# EAGLE board InkTime_Board (EAGLE 9.7.0), part 1 of 2
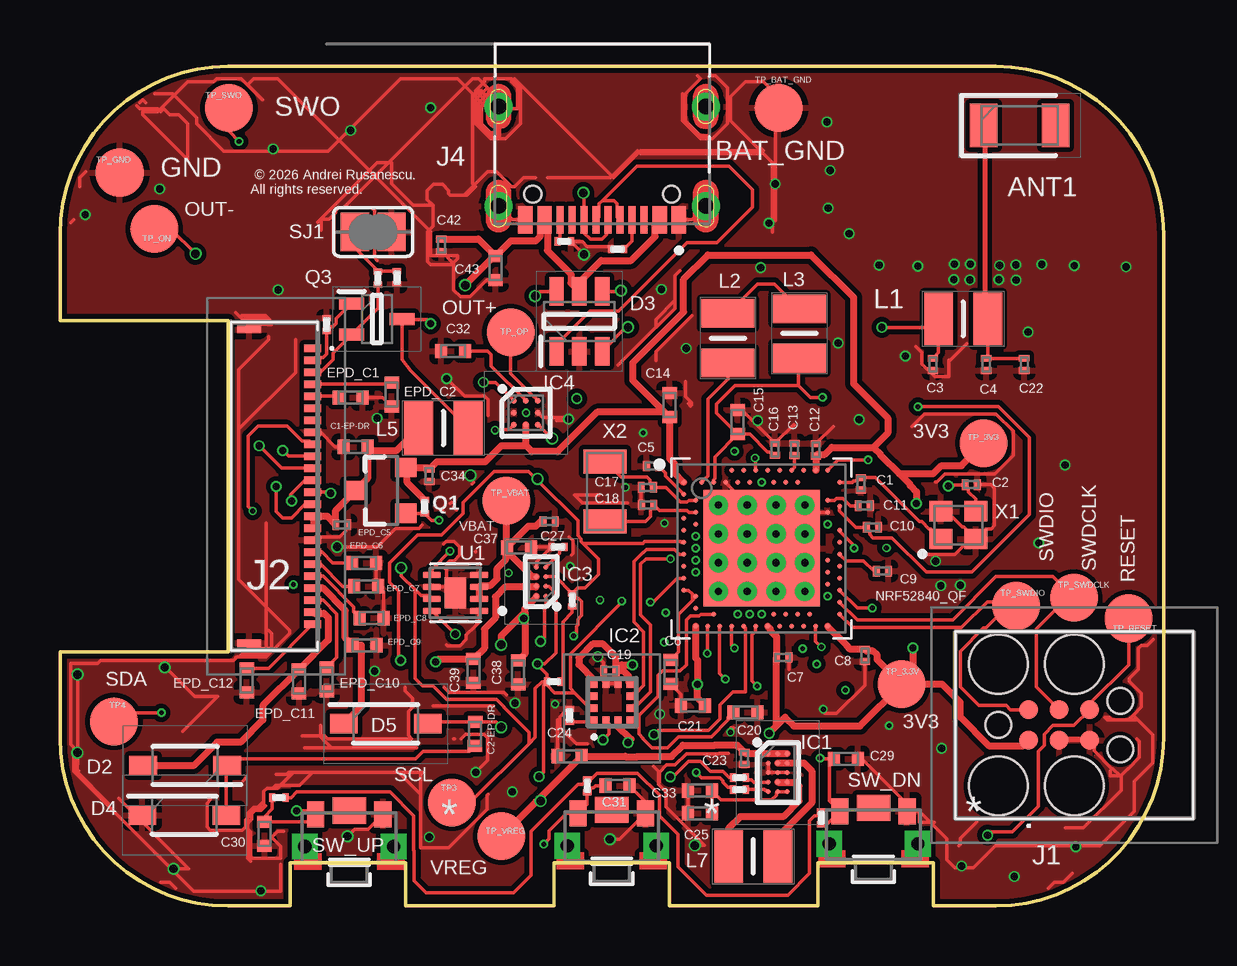
[diagram p0: board, top side]
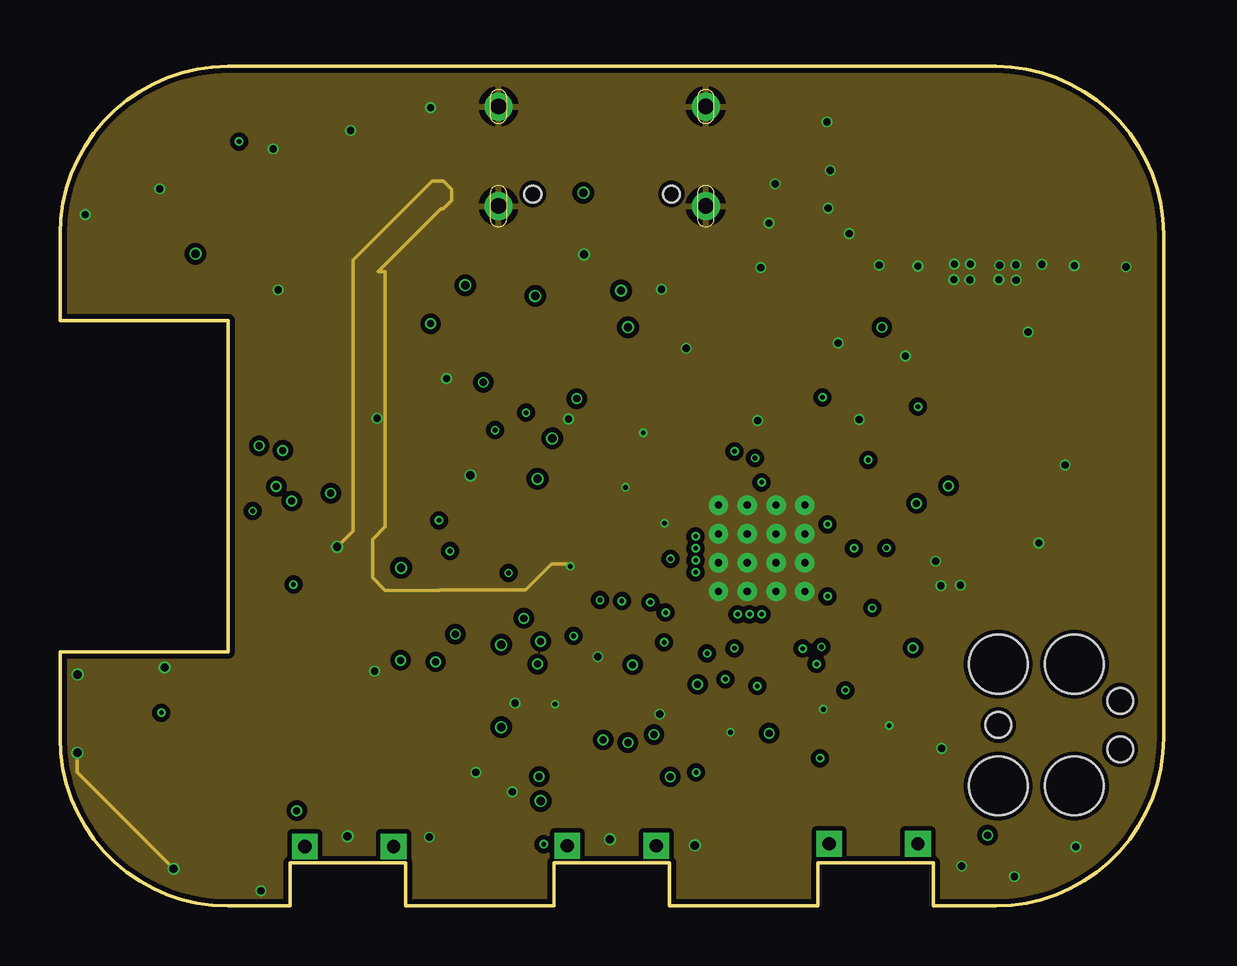
[diagram p1: board, inner layer Route2]
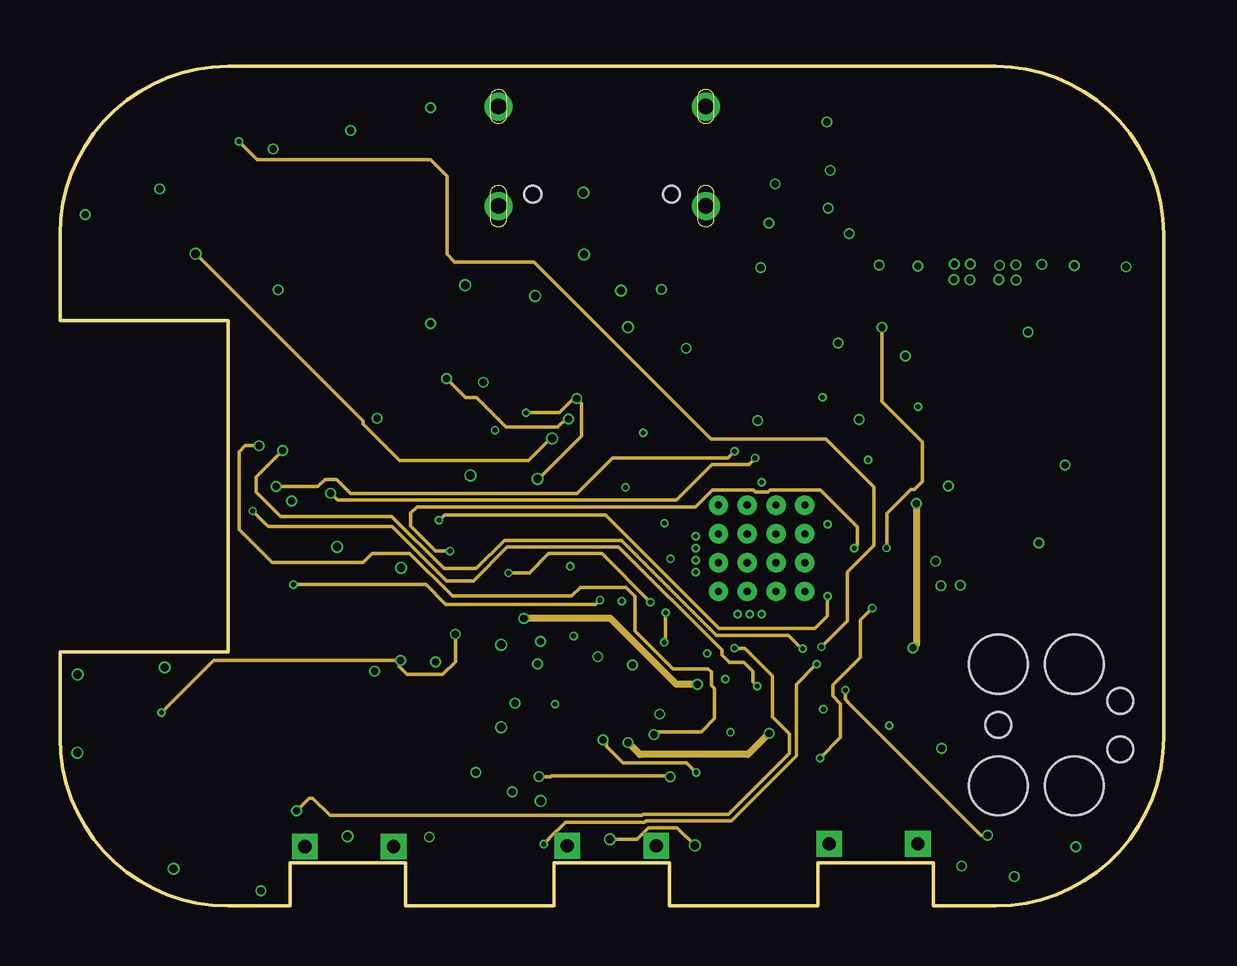
[diagram p2: board, inner layer Route15]
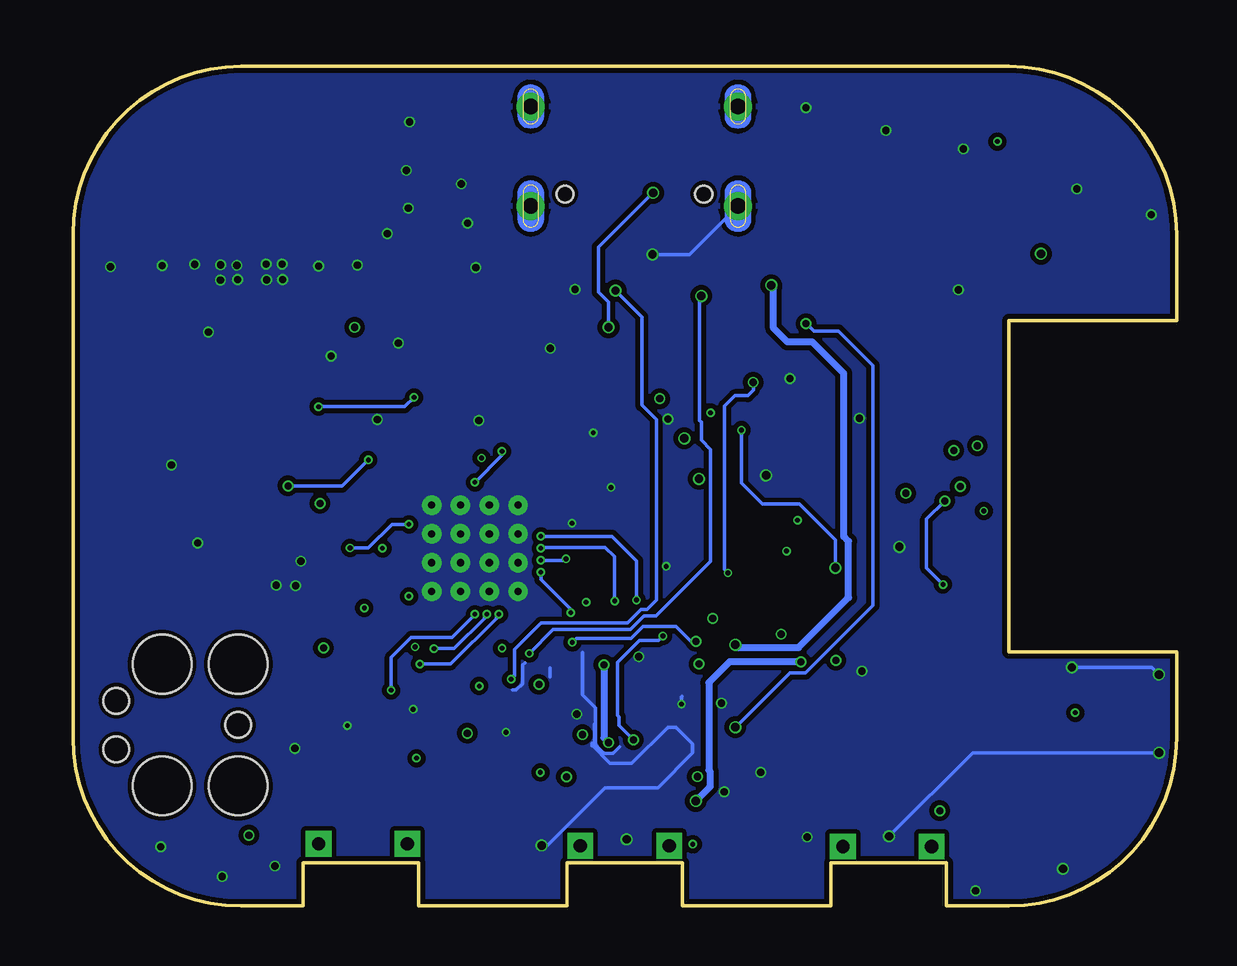
[diagram p3: board, bottom side, seen from below]

Size 46 x 35 mm. Coordinates in mm from the lower left corner, seen from the top.
Outline: 39,0 36.4,0 36.4,1.8 31.6,1.8 31.6,0 25.4,0 25.4,1.8 20.6,1.8 20.6,0 14.4,0 14.4,1.8 9.6,1.8 9.6,0 7,0 arc-90 0,7 0,10.6 7,10.6 7,24.4 0,24.4 0,28 arc-90 7,35 39,35 arc-90 46,28 46,7 arc-90 39,0
Copper layers (1+2*15+16): Top 0.035mm / dielectric 1.6mm / Route2 0.035mm / dielectric 0.15mm / Route15 0.035mm / dielectric 0.2mm / Bottom 0.035mm
Design rules "jlcpcb-2layers.dru *": minimum track width 0.15mm, minimum drill 0.2mm, track to track 5mil, track to pad 0.15mm, pad to pad 0.15mm, via to via 0.15mm, smd to smd 0.15mm, copper to edge 0.2mm, drill to drill 6mil, minimum pad ring 10mil, minimum via ring 0.075mm, stop-mask expansion 4mil, vias tented up to drill 0mil, thermal gap 10mil
Net classes: 1 power_width: width 0.3 mm

## Footprints (pad centres in the part's own frame; a part is rotated, then mirrored left to right if it is on the bottom)
2450AT18B100E_ANTC3216X140N = smd 1.15 x 1.8: 1 -1.5,0; 2 1.5,0
NORDIC_NRF_3_RESC0201_L = smd 0.28 x 0.43: 1 -0.255,0; 2 0.255,0
NORDIC_NRF_3_RESC0402_L = smd 0.5 x 0.6: 1 -0.5,0; 2 0.5,0
ESP32_C6_LIBRARY_5_SOD3716X135N = smd 1.15 x 0.8: 1 -1.75,0; 2 1.75,0
ESP32_C6_LIBRARY_3_SOT95P280X145-6N = smd 1.2 x 0.6: 1 -1.25,0.95; 2 -1.25,0; 3 -1.25,-0.95; 4 1.25,-0.95; 5 1.25,0; 6 1.25,0.95
RT6160AWSC_BGA15C40P3X5_140X230X60 = smd 0.216 x 0.216: A1 -0.4,0.8; A2 0,0.8; A3 0.4,0.8; B1 -0.4,0.4; B2 0,0.4; B3 0.4,0.4; C1 -0.4,0; C2 0,0; C3 0.4,0; D1 -0.4,-0.4; D2 0,-0.4; D3 0.4,-0.4; E1 -0.4,-0.8; E2 0,-0.8; E3 0.4,-0.8
BMA423_BMA423 = smd 0.3 x 0.35: 1 -0.75,-0.775; 2 -0.25,-0.775; 3 0.25,-0.775; 4 0.75,-0.775; 7 0.75,0.775; 8 0.25,0.775; 9 -0.25,0.775; 10 -0.75,0.775 | smd 0.35 x 0.3: 5 0.775,-0.25; 6 0.775,0.25; 11 -0.775,0.25; 12 -0.775,-0.25
BQ25180YBGR_BGA8C40P2X4_100X155X50 = smd 0.2 x 0.2: A1 -0.2,0.6; A2 0.2,0.6; B1 -0.2,0.2; B2 0.2,0.2; C1 -0.2,-0.2; C2 0.2,-0.2; D1 -0.2,-0.6; D2 0.2,-0.6
DRV2605YZFR_BGA9C50P3X3_144X144X62 = smd 0.25 x 0.25: A1 -0.5,0.5; A2 0,0.5; A3 0.5,0.5; B1 -0.5,0; B2 0,0; B3 0.5,0; C1 -0.5,-0.5; C2 0,-0.5; C3 0.5,-0.5
TC2030-IDC_TC2030IDC = smd 0.783 x 0.783: 1 -0.953,-0.635; 2 -0.953,0.635; 3 0.317,-0.635; 4 0.317,0.635; 5 1.588,-0.635; 6 1.588,0.635 | hole 2.451: -2.223,-2.54; -2.223,2.54; 0.952,-2.54; 0.952,2.54 | hole 1.067: -2.223,0; 2.857,-1.016; 2.857,1.016
503480-2400_5034802400 = smd 0.3 x 0.7: 1 -5.75,1.525; 2 -5.25,1.525; 3 -4.75,1.525; 4 -4.25,1.525; 5 -3.75,1.525; 6 -3.25,1.525; 7 -2.75,1.525; 8 -2.25,1.525; 9 -1.75,1.525; 10 -1.25,1.525; 11 -0.75,1.525; 12 -0.25,1.525; 13 0.25,1.525; 14 0.75,1.525; 15 1.25,1.525; 16 1.75,1.525; 17 2.25,1.525; 18 2.75,1.525; 19 3.25,1.525; 20 3.75,1.525; 21 4.25,1.525; 22 4.75,1.525; 23 5.25,1.525; 24 5.75,1.525 | smd 0.3 x 1: MP1 -6.54,-1.125; MP2 6.54,-1.125
KH-TYPE-C-16P_KINGHELM_KH-TYPE-C-16P = smd 0.6 x 1.15: A1_B12 -3.2,4.725; A4_B9 -2.4,4.725; A9_B4 2.4,4.725; A12_B1 3.2,4.725 | smd 0.3 x 1.15: A5 -1.25,4.725; A6 -0.25,4.725; A7 0.25,4.725; A8 1.25,4.725; B5 1.75,4.725; B6 0.75,4.725; B7 -0.75,4.725; B8 -1.75,4.725 | drill 0.65 pad 1.05: SH1 -4.32,0; SH2 4.32,0; SH3 -4.32,4.15; SH4 4.32,4.15 | hole 0.7: -2.89,3.65; 2.89,3.65
MLP2016SR47MT0S1_INDC2016X100N = smd 1.2 x 2.2: 1 -1.028,0; 2 1.028,0
NORDIC_NRF_4_AQFN50P700X700X85_HS-74N = smd 4.85 x 4.85: P$74 0,0 | drill 0.3 pad 0.6: P$75 -1.8,1.8; P$76 -0.6,1.8; P$77 0.6,1.8; P$78 1.8,1.8; P$79 -1.8,0.6; P$80 -0.6,0.6; P$81 0.6,0.6; P$82 1.8,0.6; P$83 -1.8,-0.6; P$84 -0.6,-0.6; P$85 0.6,-0.6; P$86 1.8,-0.6; P$87 -1.8,-1.8; P$88 -0.6,-1.8; P$89 0.6,-1.8; P$90 1.8,-1.8 | smd 0.2 x 0.2: P$A8 -1.25,3.25; P$A10 -0.75,3.25; P$A12 -0.25,3.25; P$A14 0.25,3.25; P$A16 0.75,3.25; P$A18 1.25,3.25; P$A20 1.75,3.25; P$A22 2.25,3.25; P$A23 2.75,3.25; P$AA24 3.25,-2.25; P$AB2 -2.75,-2.5; P$AC5 -2,-2.75; P$AC9 -1,-2.75; P$AC11 -0.5,-2.75; P$AC13 0,-2.75; P$AC15 0.5,-2.75; P$AC17 1,-2.75; P$AC19 1.5,-2.75; P$AC21 2,-2.75; P$AC24 3.25,-2.75; P$AD2 -2.75,-3.25; P$AD4 -2.25,-3.25; P$AD6 -1.75,-3.25; P$AD8 -1.25,-3.25; P$AD10 -0.75,-3.25; P$AD12 -0.25,-3.25; P$AD14 0.25,-3.25; P$AD16 0.75,-3.25; P$AD18 1.25,-3.25; P$AD20 1.75,-3.25; P$AD22 2.25,-3.25; P$AD23 2.75,-3.25; P$B1 -3.25,2.75; P$B3 -2.5,2.75; P$B5 -2,2.75; P$B7 -1.5,2.75; P$B9 -1,2.75; P$B11 -0.5,2.75; P$B13 0,2.75; P$B15 0.5,2.75; P$B17 1,2.75; P$B19 1.5,2.75; P$B24 3.25,2.75; P$C1 -3.25,2.25; P$D2 -2.75,2; P$D23 2.75,2; P$E24 3.25,1.75; P$F2 -2.75,1.5; P$F23 2.75,1.5; P$G1 -3.25,1.25; P$H2 -2.75,1; P$H23 2.75,1; P$J1 -3.25,0.75; P$J24 3.25,0.75; P$K2 -2.75,0.5; P$L1 -3.25,0.25; P$L24 3.25,0.25; P$M2 -2.75,0; P$N1 -3.25,-0.25; P$N24 3.25,-0.25; P$P2 -2.75,-0.5; P$P23 2.75,-0.5; P$R1 -3.25,-0.75; P$R24 3.25,-0.75; P$T2 -2.75,-1; P$T23 2.75,-1; P$U1 -3.25,-1.25; P$U24 3.25,-1.25; P$V23 2.75,-1.5; P$W1 -3.25,-1.75; P$W24 3.25,-1.75; P$Y2 -2.75,-2; P$Y23 2.75,-2
ESP32_C6_LIBRARY_4_ESP32_C6_LIBRARY_4_ESP32_C6_LIBRARY_4_ESP32_C6_LIBRARY_4_ESP32_WROVER_SPARKFUN-DISCRETESEMI_SOT23-3 = smd 0.8 x 0.9: 1 -0.95,-1; 2 0.95,-1; 3 0,1.1
ESP32_C6_LIBRARY_6_SOT65P210X110-3N = smd 1.05 x 0.5: 1 -1.05,0.65; 2 -1.05,-0.65; 3 1.05,0
CPF0201D7K68C1_0201 = smd 0.35 x 0.25: 1 0,0.275; 2 0,-0.275
ESP32_C6_LIBRARY_7_JUMPER_SJ = smd 1.168 x 1.6: 1 -0.762,0; 2 0.762,0
2025-10-22_07-23-44_LIBRARY_SW_EVP-AKE31A_PAN = smd 0.711 x 1.092: 1 -1.4,-0.972; 2 1.4,-0.972 | drill 0.559 pad 0.914 square: 3 -1.848,0.381; 4 1.848,0.381 | smd 1.397 x 1.092: 5 0,-1.124
HECTOR_WATCH_1_TP20R = smd 2 x 2: TP 0,0
ESP32_C6_LIBRARY_SON50P200X200X80-9N = smd 0.76 x 0.27: 1 -0.985,0.75; 2 -0.985,0.25; 3 -0.985,-0.25; 4 -0.985,-0.75; 5 0.985,-0.75; 6 0.985,-0.25; 7 0.985,0.25; 8 0.985,0.75 | smd 0.9 x 1.3: 9 0,0
NORDIC_NRF_BT-XTAL_2016_N = smd 0.95 x 0.85: 1 -0.725,-0.575; 2 0.725,-0.575; 3 0.725,0.575; 4 -0.725,0.575
NORDIC_NRF_1_XTAL_3215_N = smd 1 x 1.8: 1 -1.25,0; 2 1.25,0

## Placement (x,y rotation side)
ANT1  2450AT18B100E  [2450AT18B100E_ANTC3216X140N]  40,32.54 0 top
C1  12pF  [NORDIC_NRF_3_RESC0201_L]  33.39,17.6 270 top
C1-EP-DR  10uF  [NORDIC_NRF_3_RESC0402_L]  12.32,19.14 180 top
C2  12pF  [NORDIC_NRF_3_RESC0201_L]  37.99,17.57 0 top
C2-EP-DR  4.7uF  [NORDIC_NRF_3_RESC0402_L]  17.3,7.17 89.2 top
C3  1pF  [NORDIC_NRF_3_RESC0201_L]  36.38,22.57 270 top
C4  1pF  [NORDIC_NRF_3_RESC0201_L]  38.6,22.57 270 top
C5  100nF  [NORDIC_NRF_3_RESC0201_L]  24.7,18.35 180 top
C6  4.7uF  [NORDIC_NRF_3_RESC0402_L]  25.46,9.77 270 top
C7  100nF  [NORDIC_NRF_3_RESC0201_L]  30.13,10.36 0 top
C8  100nF  [NORDIC_NRF_3_RESC0201_L]  33.55,10.45 270 top
C9  820pF  [NORDIC_NRF_3_RESC0201_L]  34.28,13.96 0 top
C10  N.C.  [NORDIC_NRF_3_RESC0201_L]  33.87,15.79 0 top
C11  100pF  [NORDIC_NRF_3_RESC0201_L]  33.53,16.68 0 top
C12  100nF  [NORDIC_NRF_3_RESC0201_L]  31.51,19.02 90 top
C13  N.C.  [NORDIC_NRF_3_RESC0201_L]  30.61,19.03 90 top
C14  4.7uF  [NORDIC_NRF_3_RESC0402_L]  25.41,20.88 90 top
C15  1.0uF  [NORDIC_NRF_3_RESC0402_L]  28.24,20.17 90 top
C16  47nF  [NORDIC_NRF_3_RESC0201_L]  29.8,19.04 90 top
C17  12pF  [NORDIC_NRF_3_RESC0201_L]  24.48,17.45 0 top
C18  12pF  [NORDIC_NRF_3_RESC0201_L]  24.5,16.72 0 top
C19  100nF  [NORDIC_NRF_3_RESC0201_L]  22.92,9.81 180 top
C20  4.7uF  [NORDIC_NRF_3_RESC0402_L]  28.57,8.07 0 top
C21  4.7uF  [NORDIC_NRF_3_RESC0402_L]  26.39,8.36 180 top
C22  N.C.  [NORDIC_NRF_3_RESC0201_L]  40.19,22.57 270 top
C23  0.1uF  [NORDIC_NRF_3_RESC0201_L]  28.53,6.16 90 top
C24  10uF  [NORDIC_NRF_3_RESC0402_L]  21.25,6.24 0 top
C25  22uF  [NORDIC_NRF_3_RESC0402_L]  26.67,3.87 180 top
C27  0.1uF  [NORDIC_NRF_3_RESC0201_L]  20.39,16.03 0 top
C29  1uF  [NORDIC_NRF_3_RESC0402_L]  32.76,6.14 0 top
C30  1uF  [NORDIC_NRF_3_RESC0402_L]  8.52,3.01 270 top
C31  1uF  [NORDIC_NRF_3_RESC0402_L]  23.24,5.01 0 top
C32  1uF  [NORDIC_NRF_3_RESC0402_L]  16.39,23.13 180 top
C33  22uF  [NORDIC_NRF_3_RESC0402_L]  26.67,4.82 180 top
C34  0.1uF  [NORDIC_NRF_3_RESC0201_L]  15.39,17.95 270 top
C37  1uF  [NORDIC_NRF_3_RESC0402_L]  19.14,14.94 0 top
C38  1uF  [NORDIC_NRF_3_RESC0402_L]  19.1,9.73 270 top
C39  10uF  [NORDIC_NRF_3_RESC0402_L]  17.24,9.8 270 top
C42  0.1uF  [NORDIC_NRF_3_RESC0201_L]  15.9,27.55 270 top
C43  4.7uF  [NORDIC_NRF_3_RESC0402_L]  18.16,26.59 270 top
D2  MBR0530  [ESP32_C6_LIBRARY_5_SOD3716X135N]  5.22,5.85 180 top
D3  ESP32_C6_LIBRARY_3_USBLC6-2SC6Y  [ESP32_C6_LIBRARY_3_SOT95P280X145-6N]  21.65,24.37 90 top
D4  MBR0530  [ESP32_C6_LIBRARY_5_SOD3716X135N]  5.18,3.79 0 top
D5  MBR0530  [ESP32_C6_LIBRARY_5_SOD3716X135N]  13.58,7.6 0 top
EPD_C1  1uF  [NORDIC_NRF_3_RESC0402_L]  12.12,21.2 180 top
EPD_C2  1uF  [NORDIC_NRF_3_RESC0402_L]  13.83,21.32 90 top
EPD_C5  0.1uF  [NORDIC_NRF_3_RESC0201_L]  11.75,15.89 180 top
EPD_C6  1uF  [NORDIC_NRF_3_RESC0402_L]  12.68,14.3 180 top
EPD_C7  1uF  [NORDIC_NRF_3_RESC0402_L]  12.77,13.33 180 top
EPD_C8  1uF  [NORDIC_NRF_3_RESC0402_L]  12.99,12 180 top
EPD_C9  1uF  [NORDIC_NRF_3_RESC0402_L]  12.69,10.87 180 top
EPD_C10  1uF  [NORDIC_NRF_3_RESC0402_L]  11.12,9.45 90 top
EPD_C11  1uF  [NORDIC_NRF_3_RESC0402_L]  9.96,9.36 90 top
EPD_C12  1uF  [NORDIC_NRF_3_RESC0402_L]  7.79,9.41 90 top
IC1  RT6160AWSC  [RT6160AWSC_BGA15C40P3X5_140X230X60]  29.92,5.56 0 top
IC2  BMA423  [BMA423_BMA423]  23.01,8.5 0 top
IC3  BQ25180YBGR  [BQ25180YBGR_BGA8C40P2X4_100X155X50]  20.06,13.52 180 top
IC4  DRV2605YZFR  [DRV2605YZFR_BGA9C50P3X3_144X144X62]  19.43,20.56 0 top
J1  TC2030-IDC  [TC2030-IDC_TC2030IDC]  41.33,7.54 0 top
J2  503480-2400  [503480-2400_5034802400]  9.01,17.5 270 top
J4  KH-TYPE-C-16P_KH-TYPE-C-16P  [KH-TYPE-C-16P_KINGHELM_KH-TYPE-C-16P]  22.6,33.33 180 top
L1  3.9nH  [MLP2016SR47MT0S1_INDC2016X100N]  37.65,24.48 0 top
L2  10uH  [MLP2016SR47MT0S1_INDC2016X100N]  27.84,23.68 90 top
L3  15nH  [MLP2016SR47MT0S1_INDC2016X100N]  30.82,23.87 270 top
L5  68uH  [MLP2016SR47MT0S1_INDC2016X100N]  15.98,19.93 0 top
L7  FTC252012SR47MBCA  [MLP2016SR47MT0S1_INDC2016X100N]  28.9,2.06 180 top
NRF52840_QF  NRF52840_QF  [NORDIC_NRF_4_AQFN50P700X700X85_HS-74N]  29.25,14.92 0 top
Q1  20V/4.2A/52mΩ/1.4W  [ESP32_C6_LIBRARY_4_ESP32_C6_LIBRARY_4_ESP32_C6_LIBRARY_4_ESP32_C6_LIBRARY_4_ESP32_WROVER_SPARKFUN-DISCRETESEMI_SOT23-3]  13.42,17.33 90 top
Q3  SI1308EDL-T1-GE3  [ESP32_C6_LIBRARY_6_SOT65P210X110-3N]  13.21,24.47 0 top
R1  0  [CPF0201D7K68C1_0201]  28.33,5.36 90 top
R1_EP_DR  0.47  [CPF0201D7K68C1_0201]  13.26,26.18 0 top
R1_USB  5k1  [CPF0201D7K68C1_0201]  23.24,27.38 90 top
R2  0  [CPF0201D7K68C1_0201]  28.33,4.86 90 top
R2_EP_DR  10K  [CPF0201D7K68C1_0201]  11.12,24.23 0 top
R2_USB  5K1  [CPF0201D7K68C1_0201]  21.02,27.7 90 top
R3  3K3  [CPF0201D7K68C1_0201]  20.58,9.35 270 top
R4  3K3  [CPF0201D7K68C1_0201]  21.35,12.75 180 top
R5  0  [CPF0201D7K68C1_0201]  21.24,7.95 0 top
R6  10K  [CPF0201D7K68C1_0201]  20.75,14.97 90 top
R7  10k  [CPF0201D7K68C1_0201]  9.13,4.51 90 top
R8  10k  [CPF0201D7K68C1_0201]  21.97,5 180 top
R9  10k  [CPF0201D7K68C1_0201]  31.72,3.68 180 top
R_PWR_EPD  10K  [CPF0201D7K68C1_0201]  15.2,16.65 180 top
R_TYPE_SEL  2.2  [CPF0201D7K68C1_0201]  14.05,26.2 180 top
SJ1  [ESP32_C6_LIBRARY_7_JUMPER_SJ]  13.05,28.1 180 top
SW_DN  EVP-AKE31A_PAN  [2025-10-22_07-23-44_LIBRARY_SW_EVP-AKE31A_PAN]  33.91,2.97 180 top
SW_ENT  EVP-AKE31A_PAN  [2025-10-22_07-23-44_LIBRARY_SW_EVP-AKE31A_PAN]  23,2.89 180 top
SW_UP  EVP-AKE31A_PAN  [2025-10-22_07-23-44_LIBRARY_SW_EVP-AKE31A_PAN]  12.06,2.85 180 top
TP3  HECTOR_WATCH_1_TPTP20R  [HECTOR_WATCH_1_TP20R]  16.34,4.31 0 top
TP4  HECTOR_WATCH_1_TPTP20R  [HECTOR_WATCH_1_TP20R]  2.25,7.7 0 top
TP_3.3V  HECTOR_WATCH_1_TPTP20R  [HECTOR_WATCH_1_TP20R]  35.09,9.24 0 top
TP_3V3  HECTOR_WATCH_1_TPTP20R  [HECTOR_WATCH_1_TP20R]  38.51,19.29 0 top
TP_BAT_GND  HECTOR_WATCH_1_TPTP20R  [HECTOR_WATCH_1_TP20R]  29.96,33.27 0 top
TP_GND  HECTOR_WATCH_1_TPTP20R  [HECTOR_WATCH_1_TP20R]  2.49,30.57 0 top
TP_ON  HECTOR_WATCH_1_TPTP20R  [HECTOR_WATCH_1_TP20R]  3.93,28.23 0 top
TP_OP  HECTOR_WATCH_1_TPTP20R  [HECTOR_WATCH_1_TP20R]  18.79,23.91 0 top
TP_RESET  HECTOR_WATCH_1_TPTP20R  [HECTOR_WATCH_1_TP20R]  44.54,11.99 0 top
TP_SWDCLK  HECTOR_WATCH_1_TPTP20R  [HECTOR_WATCH_1_TP20R]  42.26,12.85 0 top
TP_SWDIO  HECTOR_WATCH_1_TPTP20R  [HECTOR_WATCH_1_TP20R]  39.86,12.51 0 top
TP_SWO  HECTOR_WATCH_1_TPTP20R  [HECTOR_WATCH_1_TP20R]  7.04,33.26 0 top
TP_VBAT  HECTOR_WATCH_1_TPTP20R  [HECTOR_WATCH_1_TP20R]  18.6,16.89 0 top
TP_VREG  HECTOR_WATCH_1_TPTP20R  [HECTOR_WATCH_1_TP20R]  18.4,2.91 0 top
U1  MAX17048G+T10  [ESP32_C6_LIBRARY_SON50P200X200X80-9N]  16.49,13.05 180 top
X1  32MHZ  [NORDIC_NRF_BT-XTAL_2016_N]  37.45,15.88 0 top
X2  32.768KHZ  [NORDIC_NRF_1_XTAL_3215_N]  22.71,17.29 270 top

## Library data of the parts
ANT1 = InkTime_v5; ARROW_PART_NUMBER: 2450AT18B100E; ARROW_PRICE-STOCK: https://www.arrow.com/en/products/2450at18b100e/johanson-dielectrics?utm_currency=USD&region=nac; DESCRIPTION: Antennas 2.45GHz ANTENNA; HEIGHT: 1.4mm; MANUFACTURER_NAME: JOHANSON TECHNOLOGY; MANUFACTURER_PART_NUMBER: 2450AT18B100E; MOUSER_PART_NUMBER: 609-2450AT18B100E; MOUSER_PRICE-STOCK: https://www.mouser.co.uk/ProductDetail/Johanson-Technology/2450AT18B100E?qs=yCnrNFeXz%252Bh5MFsFIXGZGA%3D%3D
C1 C1-EP-DR C2 C2-EP-DR C3-C18 C20-C25 C27 C29-C34 C37-C39 C42 C43 EPD_C1 EPD_C2 EPD_C5-EPD_C12 NRF52840_QF R1 R1_EP_DR R1_USB R2 R2_EP_DR R2_USB R3-R9 R_PWR_EPD R_TYPE_SEL SJ1 TP3 TP4 TP_3.3V TP_3V3 TP_BAT_GND TP_GND TP_ON TP_OP TP_RESET TP_SWDCLK TP_SWDIO TP_SWO TP_VBAT TP_VREG X1 X2 = InkTime_v5
C19 = InkTime_v5; SPICEPREFIX: C
D2 D4 D5 = InkTime_v5; AVAILABILITY: In Stock; CHECK_PRICES: https://www.snapeda.com/parts/MBR0530/Onsemi/view-part/?ref=eda; DESCRIPTION: Diode Schottky 30 V 500mA Surface Mount SOD-123; MF: ON Semiconductor; MP: MBR0530; PACKAGE: SOD-123-2 ON Semiconductor; PRICE: None; PURCHASE-URL: https://www.snapeda.com/api/url_track_click_mouser/?unipart_id=179458&manufacturer=ON Semiconductor&part_name=MBR0530&search_term=None; SNAPEDA_LINK: https://www.snapeda.com/parts/MBR0530/Onsemi/view-part/?ref=snap
D3 = InkTime_v5; AVAILABILITY: In Stock; CHECK_PRICES: https://www.snapeda.com/parts/USBLC6-2SC6Y/STMicroelectronics/view-part/?ref=eda; DESCRIPTION: 17V Clamp 5A (8/20µs) Ipp Tvs Diode Surface Mount SOT-23-6; MF: STMicroelectronics; MP: USBLC6-2SC6Y; PACKAGE: SOT-23-6 STMicroelectronics; PRICE: None; SNAPEDA_LINK: https://www.snapeda.com/parts/USBLC6-2SC6Y/STMicroelectronics/view-part/?ref=snap
IC1 = InkTime_v5; DESCRIPTION: Buck-Boost Regulator Positive Output Step-Up/Step-Down I2C DC-DC Controller IC 15-WL-CSP (BSC) (1.4x2.3); HEIGHT: 0.6mm; MANUFACTURER_NAME: RICHTEK; MANUFACTURER_PART_NUMBER: RT6160AWSC; MOUSER_PART_NUMBER: 835-RT6160AWSC; MOUSER_PRICE-STOCK: https://www.mouser.co.uk/ProductDetail/Richtek/RT6160AWSC?qs=amGC7iS6iy%2FLd9PSoixZXQ%3D%3D
IC2 = InkTime_v5; ARROW_PART_NUMBER: BMA423; ARROW_PRICE-STOCK: https://www.arrow.com/en/products/bma423/bosch; DESCRIPTION: Accelerometers Triaxial low-g 12bit Acceleration Sensor; HEIGHT: 1mm; MANUFACTURER_NAME: BOSCH; MANUFACTURER_PART_NUMBER: BMA423; MOUSER_PART_NUMBER: 262-BMA423; MOUSER_PRICE-STOCK: https://www.mouser.co.uk/ProductDetail/Bosch-Sensortec/BMA423?qs=HXFqYaX1Q2xC%252BSgeGoX3mg%3D%3D
IC3 = InkTime_v5; ARROW_PART_NUMBER: BQ25180YBGR; ARROW_PRICE-STOCK: https://www.arrow.com/en/products/bq25180ybgr/texas-instruments?utm_currency=USD&region=nac; DESCRIPTION: Charger IC Lithium Ion/Polymer, Lithium Iron Phosphate 8-DSBGA (1.6x1.1); HEIGHT: 0.5mm; MANUFACTURER_NAME: Texas Instruments; MANUFACTURER_PART_NUMBER: BQ25180YBGR; MOUSER_PART_NUMBER: 595-BQ25180YBGR; MOUSER_PRICE-STOCK: https://www.mouser.co.uk/ProductDetail/Texas-Instruments/BQ25180YBGR?qs=doiCPypUmgEWjAK%252BJAX6Tw%3D%3D
IC4 = InkTime_v5; ARROW_PART_NUMBER: DRV2605YZFR; ARROW_PRICE-STOCK: https://www.arrow.com/en/products/drv2605yzfr/texas-instruments?region=nac; DESCRIPTION: Haptic Driver for ERM/LRA with Built-In Library and Smart Loop Architecture; HEIGHT: 0.625mm; MANUFACTURER_NAME: Texas Instruments; MANUFACTURER_PART_NUMBER: DRV2605YZFR
J1 = InkTime_v5; DESCRIPTION: CABLE ADAPTER 6 POS; HEIGHT: 19mm; MANUFACTURER_NAME: Tag Connect; MANUFACTURER_PART_NUMBER: TC2030-IDC
J2 = InkTime_v5; DESCRIPTION: FFC & FPC Connectors 0.5mm FPC RA SMT Dual Contact 24Ckt; HEIGHT: 1.87mm; MANUFACTURER_NAME: Molex; MANUFACTURER_PART_NUMBER: 503480-2400; MOUSER_PART_NUMBER: 538-503480-2400; MOUSER_PRICE-STOCK: https://www.mouser.co.uk/ProductDetail/Molex/503480-2400?qs=OAhjpuo3Vu7efIoxFh9AOw%3D%3D
J4 = InkTime_v5; AVAILABILITY: Not in stock; CHECK_PRICES: https://www.snapeda.com/parts/KH-TYPE-C-16P/Kinghelm/view-part/?ref=eda; MF: kinghelm; MP: KH-TYPE-C-16P; PACKAGE: None; PRICE: None; SNAPEDA_LINK: https://www.snapeda.com/parts/KH-TYPE-C-16P/Kinghelm/view-part/?ref=snap
L1-L3 L5 L7 = InkTime_v5; DESCRIPTION: SMD / SMT Inductors (Coils), L=0.47?H, L x W x T :; HEIGHT: 1mm; JLCPCB: https://jlcpcb.com/partdetail/6763488-FTC252012SR47MBCA/C5832368; MANUFACTURER_NAME: TDK; MANUFACTURER_PART_NUMBER: FTC252012SR47MBCA
Q1 = InkTime_v5; PROD_ID: TRAN-14388
Q3 = InkTime_v5; AVAILABILITY: In Stock; CHECK_PRICES: https://www.snapeda.com/parts/SI1308EDL-T1-GE3/Vishay+Siliconix/view-part/?ref=eda; DESCRIPTION: Si1308EDL-T1-GE3 N-channel MOSFET Transistor, 1.5 A, 30 V, 3-Pin SC-70 | Siliconix / Vishay SI1308EDL-T1-GE3; MF: Vishay Siliconix; MP: SI1308EDL-T1-GE3; PACKAGE: SOT-323 Vishay Semiconductor; PRICE: None; PURCHASE-URL: https://www.snapeda.com/api/url_track_click_mouser/?unipart_id=274603&manufacturer=Vishay Siliconix&part_name=SI1308EDL-T1-GE3&search_term=None; SNAPEDA_LINK: https://www.snapeda.com/parts/SI1308EDL-T1-GE3/Vishay+Siliconix/view-part/?ref=snap
SW_DN SW_ENT SW_UP = InkTime_v5; COPYRIGHT: Copyright (C) 2025 Ultra Librarian. All rights reserved.; DIGI-KEY_PART_NUMBER_1: P123437TR-ND; DIGI-KEY_PART_NUMBER_2: P123437CT-ND; DIGI-KEY_PART_NUMBER_3: P123437DKR-ND; MANUFACTURER_NAME: Panasonic; MANUFACTURER_PART_NUMBER: EVP-AKE31A
U1 = InkTime_v5; AVAILABILITY: In Stock; CHECK_PRICES: https://www.snapeda.com/parts/MAX17048G+T10/Analog+Devices/view-part/?ref=eda; DESCRIPTION: 3µA 1-Cell/2-Cell Fuel Gauge with ModelGauge; MF: Analog Devices; MP: MAX17048G+T10; PACKAGE: TDFN-8 Maxim; PRICE: None; PURCHASE-URL: https://www.snapeda.com/api/url_track_click_mouser/?unipart_id=329239&manufacturer=Analog Devices&part_name=MAX17048G+T10&search_term=None; SNAPEDA_LINK: https://www.snapeda.com/parts/MAX17048G+T10/Analog+Devices/view-part/?ref=snap

## Nets
3V3 [power_width]: C7.1 C8.1 C12.1 C14.1 C19.1 C34.1 IC2.3 IC2.7 IC2.10 IC4.C2 J1.1 NRF52840_QF.P$A22 NRF52840_QF.P$AD14 NRF52840_QF.P$AD23 NRF52840_QF.P$B1 Q1.2 R_PWR_EPD.2 TP_3.3V.TP TP_3V3.TP
ALERT [data_width]: NRF52840_QF.P$J24 U1.5
D+ [d_plus_minus]: D3.4 NRF52840_QF.P$AD6
D- [d_plus_minus]: D3.6 NRF52840_QF.P$AD4
DEC1 [data_width]: C5.1 NRF52840_QF.P$C1
DEC3 [data_width]: C11.1 NRF52840_QF.P$D23
DEC4_6 [data_width]: C10.1 C15.1 C16.1 L3.2 NRF52840_QF.P$B5 NRF52840_QF.P$E24
DN [data_width]: D3.1 J4.A7 J4.B7
DP [data_width]: D3.3 J4.A6 J4.B6
EPD_3V3 [power_width]: C1-EP-DR.1 EPD_C5.2 J2.15 J2.16 L5.1 Q1.3
EPD_BUSY [data_width]: J2.9 NRF52840_QF.P$AD12
EPD_CS [data_width]: J2.12 NRF52840_QF.P$K2
EPD_DC [data_width]: J2.11 NRF52840_QF.P$AD10
EPD_RST [data_width]: J2.10 NRF52840_QF.P$AC11
GDR [data_width]: J2.2 Q3.1 R2_EP_DR.2
GND [data_width]: C1-EP-DR.2 C1.2 C2.2 C3.2 C4.2 C5.2 C6.2 C7.2 C8.2 C9.2 C10.2 C11.2 C12.2 C13.2 C14.2 C15.2 C16.2 C17.1 C18.1 C19.2 C20.2 C21.2 C22.2 C23.1 C24.1 C25.2 C27.2 C29.2 C30.2 C31.2 C32.2 C33.2 C34.2 C37.2 C38.2 C39.2 C42.2 C43.2 D3.2 D4.1 EPD_C1.1 EPD_C2.1 EPD_C5.1 EPD_C6.1 EPD_C7.1 EPD_C8.1 EPD_C9.1 EPD_C10.1 EPD_C11.1 EPD_C12.1 IC1.B1 IC1.C1 IC1.C2 IC1.C3 IC2.8 IC2.9 IC3.D2 IC4.B1 IC4.B3 J1.3 J1.5 J2.8 J2.17 J2.MP1 J2.MP2 J4.A1_B12 J4.A12_B1 J4.SH1 J4.SH2 J4.SH3 J4.SH4 NRF52840_QF.P$74 NRF52840_QF.P$75 NRF52840_QF.P$76 NRF52840_QF.P$77 NRF52840_QF.P$78 NRF52840_QF.P$79 NRF52840_QF.P$80 NRF52840_QF.P$81 NRF52840_QF.P$82 NRF52840_QF.P$83 NRF52840_QF.P$84 NRF52840_QF.P$85 NRF52840_QF.P$86 NRF52840_QF.P$87 NRF52840_QF.P$88 NRF52840_QF.P$89 NRF52840_QF.P$90 NRF52840_QF.P$B7 NRF52840_QF.P$F23 R1_USB.1 R2_EP_DR.1 R2_USB.2 R5.1 R6.1 R_TYPE_SEL.1 SJ1.1 SW_DN.1 SW_ENT.1 SW_UP.1 TP_BAT_GND.TP TP_GND.TP U1.1 U1.4 U1.6 U1.9 X1.2 X1.4
HAPTIC_EN [data_width]: IC4.A1 NRF52840_QF.P$U1
IMU_INT1 [data_width]: IC2.6 NRF52840_QF.P$N1
IMU_INT2 [data_width]: IC2.5 NRF52840_QF.P$P2
LX1 [power_width]: IC1.B2 L7.1
LX2 [power_width]: IC1.D2 IC1.D3 L7.2
MOSI [data_width]: J2.14 NRF52840_QF.P$B13
N$1 [data_width]: C1.1 NRF52840_QF.P$B24 X1.1
N$3 [data_width]: ANT1.1 C4.1 C22.1 L1.2
N$4 [data_width]: C3.1 L1.1 NRF52840_QF.P$H23
N$6 [data_width]: C2.1 NRF52840_QF.P$A23 X1.3
N$7 [data_width]: C6.1 NRF52840_QF.P$W1 NRF52840_QF.P$Y2
N$10 [data_width]: C20.1 NRF52840_QF.P$AC5
N$11 [data_width]: C13.1 NRF52840_QF.P$A18
N$12 [data_width]: L2.1 NRF52840_QF.P$B3
N$13 [data_width]: L2.2 L3.1
N$16 [data_width]: IC1.D1 R1.2
N$17 [data_width]: IC1.E1 R2.2
N$18 [data_width]: C9.1 NRF52840_QF.P$N24
N$19 [data_width]: C25.1 C33.1 IC1.E2 IC1.E3
N$24 [data_width]: R3.1 R4.1
N$25 [data_width]: C2-EP-DR.1 D2.1 D4.2
N$26 [data_width]: IC2.1 R5.2
N$28 [data_width]: C2-EP-DR.2 D5.2 L5.2 Q3.3
N$29 [data_width]: IC3.D1 R6.2
N$32 [data_width]: R1_EP_DR.1 R_TYPE_SEL.2 SJ1.2
N$34 [data_width]: C32.1 IC4.A2
N$35 [data_width]: R7.2 R8.2 R9.2
N$37 [data_width]: J4.A5 R1_USB.2
N$38 [data_width]: EPD_C12.2 J2.24
N$39 [data_width]: EPD_C2.2 J2.4
N$40 [data_width]: EPD_C1.2 J2.5
N$46 [data_width]: J4.B5 R2_USB.1
N$48 [data_width]: EPD_C6.2 J2.18
N$49 [data_width]: EPD_C7.2 J2.19
N$50 [data_width]: EPD_C8.2 J2.20
N$52 [data_width]: EPD_C10.2 J2.22
OUT+ [data_width]: IC4.A3 TP_OP.TP
OUT- [data_width]: IC4.C3 TP_ON.TP
P0.00/XL1 [data_width]: C17.2 NRF52840_QF.P$D2 X2.1
P0.01/XL2 [data_width]: C18.2 NRF52840_QF.P$F2 X2.2
P0.04 [data_width]: NRF52840_QF.P$J1
P0.09 [data_width]: NRF52840_QF.P$L24
P0.13 [data_width]: C30.1 NRF52840_QF.P$AD8 R7.1 SW_UP.2
P0.14 [data_width]: C31.1 NRF52840_QF.P$AC9 R8.1 SW_ENT.2
P0.19 [data_width]: NRF52840_QF.P$AC15
P0.20 [data_width]: NRF52840_QF.P$AD16
P0.21 [data_width]: NRF52840_QF.P$AC17
P0.22 [data_width]: NRF52840_QF.P$AD18
P0.23 [data_width]: NRF52840_QF.P$AC19
P0.24 [data_width]: NRF52840_QF.P$AD20
P0.25 [data_width]: NRF52840_QF.P$AC21
P0.26 [data_width]: NRF52840_QF.P$G1
P0.27 [data_width]: NRF52840_QF.P$H2
P0.28 [data_width]: NRF52840_QF.P$B11
P0.29 [data_width]: NRF52840_QF.P$A10
P0.30 [data_width]: NRF52840_QF.P$B9
P0.31 [data_width]: NRF52840_QF.P$A8
P1.01 [data_width]: NRF52840_QF.P$Y23 Q1.1 R_PWR_EPD.1
P1.02 [data_width]: C29.1 NRF52840_QF.P$W24 R9.1 SW_DN.2
P1.03 [data_width]: NRF52840_QF.P$V23
P1.04 [data_width]: NRF52840_QF.P$U24
P1.05 [data_width]: NRF52840_QF.P$T23
P1.06 [data_width]: NRF52840_QF.P$R24
P1.07 [data_width]: NRF52840_QF.P$P23
P1.09 [data_width]: NRF52840_QF.P$R1
P1.10 [data_width]: NRF52840_QF.P$A20
P1.11 [data_width]: NRF52840_QF.P$B19
P1.12 [data_width]: NRF52840_QF.P$B17
P1.13 [data_width]: NRF52840_QF.P$A16
P1.14 [data_width]: NRF52840_QF.P$B15
P1.15 [data_width]: NRF52840_QF.P$A14
PMIC_INT [data_width]: IC3.A1 NRF52840_QF.P$T2
PREVGH [power_width]: D5.1 EPD_C9.2 J2.21
PREVGL [power_width]: D2.2 EPD_C11.2 J2.23
RESE [data_width]: J2.3 Q3.2 R1_EP_DR.2
RESET [data_width]: J1.6 NRF52840_QF.P$AC13 TP_RESET.TP
SCK [data_width]: J2.13 NRF52840_QF.P$A12
SCL [data_width]: IC2.12 IC3.B1 IC4.C1 NRF52840_QF.P$M2 R1.1 R3.2 TP3.TP U1.7
SDA [data_width]: IC2.2 IC3.C1 IC4.B2 NRF52840_QF.P$L1 R2.1 R4.2 TP4.TP U1.8
SWDCLK [data_width]: J1.4 NRF52840_QF.P$AA24 TP_SWDCLK.TP
SWDIO [data_width]: J1.2 NRF52840_QF.P$AC24 TP_SWDIO.TP
SWO [data_width]: NRF52840_QF.P$AD22 TP_SWO.TP
VBAT [power_width]: C27.1 C37.1 IC3.C2 TP_VBAT.TP U1.2 U1.3
VBUS [power_width]: C21.1 C38.1 C42.1 C43.1 D3.5 IC3.A2 J4.A4_B9 J4.A9_B4 NRF52840_QF.P$AD2
VREG [power_width]: C23.2 C24.2 C39.1 IC1.A1 IC1.A2 IC1.A3 IC3.B2 TP_VREG.TP